# Altium PCB PCB1.PcbDoc
Units mm, origin at the board's own origin, x right, y up, seen from the top; angles counter-clockwise.
Board outline 10 x 16 mm, 2 copper layers (Top Layer, Bottom Layer); 13 components, 13 nets, 42 pads, 9 vias.
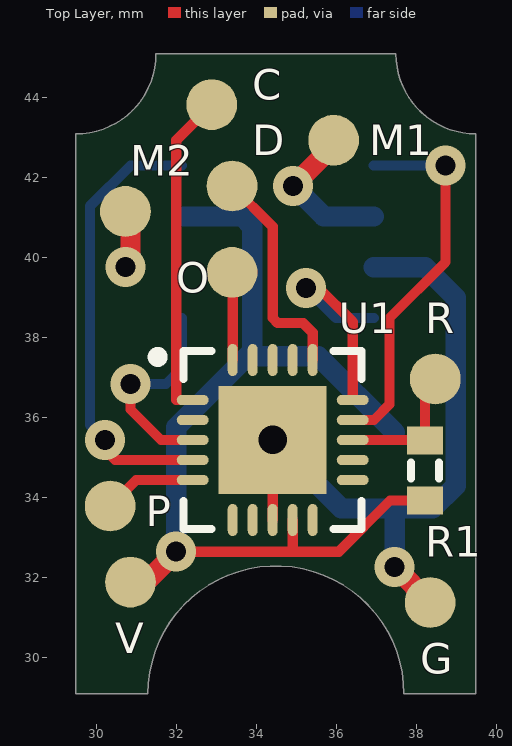
[diagram p0: Top Layer view]
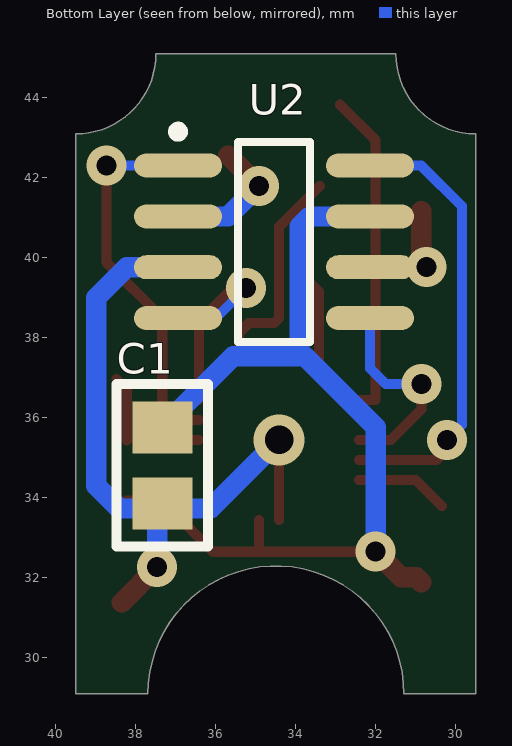
[diagram p1: Bottom Layer view, seen from below]

## Layer stack, top to bottom
Top Layer: signal copper 0.0356
Dielectric: dielectric 0.32, FR-4, Dk 4.8
Bottom Layer: signal copper 0.0356

## Board outline
29.497,29.084 29.497,43.084 ccw(c29.497,45.084) 31.497,45.084 37.497,45.084 ccw(c39.497,45.084) 39.497,43.084 39.497,29.084 37.697,29.084 ccw(c34.497,29.084) 31.297,29.084

## Design rules (kind name [scope] priority, off if disabled: settings)
AssemblyTestPointUsage [All] p1 off:
AssemblyTestpoint [All] p1 off: testpointundercomponent=TRUE minsize=1.016 maxsize=2.54 preferedsize=1.524 minholesize=0 maxholesize=1.016 preferedholesize=0.813 testpointgrid=0.025 usegrid=TRUE gridtolerance=0 allowsidetop=TRUE allowsidebottom=TRUE
Clearance Clearance_Polygon [InPolygon] p1: gap=0.203
Clearance [All] p2: gap=0.203
FabricationTestPointUsage [All] p1 off: valid=0 allowmultiple=FALSE
FabricationTestpoint [All] p1 off: side=3 testpointundercomponent=TRUE minsize=1.016 maxsize=2.54 preferedsize=1.524 minholesize=0 maxholesize=1.016 preferedholesize=0.813 testpointgrid=0.025 allowsidetop=TRUE allowsidebottom=TRUE usegrid=TRUE gridtolerance=0
HoleSize [All] p1: absolutevalues=TRUE maxlimit=6.3 minlimit=0.3 maxpercent=80.000 minpercent=20.000
HoleToHoleClearance [All] p1: gap=0.152 allowstackedmicrovias=TRUE
MinimumSolderMaskSliver [All] p1: minsoldermaskwidth=0.1
PlaneConnect [All] p1 off: planeconnectstyle=Direct reliefexpansion=0.508 reliefentries=4 reliefconductorwidth=0.254 reliefairgap=0.254
PlaneConnect Heatsink [(InNet('VCC') OR InNet('VFF'))] p2: planeconnectstyle=Direct reliefexpansion=0.508 reliefentries=4 reliefconductorwidth=0.254 reliefairgap=0.254
PolygonConnect Heatsink2 [(InNet('VCC') OR InNet('VFF')) OR IsVia] p1: connectstyle=Direct reliefconductorwidth=0.508 reliefentries=4 polygonreliefangle="90 Angle"
PolygonConnect [All] p2: connectstyle=Relief reliefconductorwidth=0.508 reliefentries=4 polygonreliefangle="90 Angle"
RoutingVias [All] p1: holewidth=0.5 width=1 viastyle="Through Hole" minholewidth=0.3 minwidth=0.762 maxholewidth=6.3 maxwidth=1.778
SilkToSilkClearance [All] p1 off: silktosilkclearance=0.152
SilkscreenOverComponentPads [All] p1: minsilkscreentomaskgap=0.152
SolderMaskExpansion Tenting [IsVia] p1: expansion=-1.016
SolderMaskExpansion [All] p2: expansion=0.127
Width [All] p1: maxlimit=1.27 minlimit=0.152 preferedwidth=0.254
18 further rules are at their usual default settings.

## Components (designator, comment, footprint, x,y, rotation, side; value= is the part's Value field where it differs from the comment)
C "Test Point" TestPoint 32.893,43.815 r90 top
C1 "CapSMD" 0805 37.338,34.798 r90 bottom
D "Test Point" TestPoint 33.401,41.783 r90 top
G "Test Point" TestPoint 38.354,31.369 r90 top
M1 "Test Point" TestPoint 35.941,42.926 r0 top
M2 "Test Point" TestPoint 30.734,41.148 r0 top
O "Test Point" TestPoint 33.401,39.624 r90 top
P "Test Point" TestPoint 30.353,33.782 r90 top
R "Test Point" TestPoint 38.481,36.957 r90 top
R1 "ResSMD" RESC1608L 38.227,34.671 r270 top
U1 "ATtiny44-15MZ" 20M1_N 34.417,35.433 r0 top
U2 "ZXMHC3F381N8" SOIC8_N 34.544,40.386 r180 bottom
V "Test Point" TestPoint 30.861,31.877 r90 top

## Footprints (in the part's own frame and the unit in brackets; to place one, negate y for a bottom-side part, rotate by r counter-clockwise, add the part's x,y. Pads: shape width x height; smd on the part's side, far side on the other; paste and mask are expansions set on the pad)
20M1_N [mm] "QFN, 20-Leads, Body 4x4mm, Pitch 0.5mm, IPC Medium Density"
  oval 0.8x0.25 smd: 1(-2,1) 2(-2,0.5) 3(-2,0) 4(-2,-0.5) 5(-2,-1) 11(2,-1) 12(2,-0.5) 13(2,0) 14(2,0.5) 15(2,1)
  oval 0.25x0.8 smd: 6(-1,-2) 7(-0.5,-2) 8(0,-2) 9(0.5,-2) 10(1,-2) 16(1,2) 17(0.5,2) 18(0,2) 19(-0.5,2) 20(-1,2)
  rect 2.7x2.7 smd: 21(0,0)
  silkscreen extent -3,-2.22 2.22,2.22, body extent -2.07,-2.07 2.07,2.07, height 0.8
0805 [mm] "Body 2.0 x 1.2 mm (LxW typ)"
  rect 1.3x1.5 smd: 1(-0.95,0) 2(0.95,0)
  silkscreen extent -2.03,-1.14 2.03,1.14, body extent -0.95,-0.6 1.05,0.65, height 0.78
RESC1608L [mm] "Chip Resistor, Body 1.6x0.8mm, IPC High Density"
  rect 0.7x0.9 smd: 1(-0.75,0) 2(0.75,0)
  silkscreen extent -0.2,-0.35 0.2,0.35, body extent -0.85,-0.48 0.85,0.48, height 0.6
SOIC8_N [mm] "8-Pin Small Outline Integrated Circuit Package (SOIC8), IPC Medium Density"
  oval 2.2x0.6 smd: 1(-2.4,1.905) 2(-2.4,0.635) 3(-2.4,-0.635) 4(-2.4,-1.905) 5(2.4,-1.905) 6(2.4,-0.635) 7(2.4,0.635) 8(2.4,1.905)
  silkscreen extent -2.53,-2.5 0.9,2.88, body extent -1.95,-2.45 1.95,2.45, height 1.75
TestPoint [mm]
  round 1.27 smd: 1(0,0)

## Part data
C1: "Capacitor"
R1: "Resistor"
U1: "8-bit Automotive AVR Microcontroller, 4KB Flash, 256 Bytes EEPROM, 256 Bytes SRAM, Automotive Grade (-40° to +125°C), 20-Pin VQFN"
U2: library part ZXMHC3F381N8TC, "Power Driver ICs MOSFET H-BRIDGE SOP-8L"

## Via types
v1: diameter 1, hole 0.5, Top Layer to Bottom Layer, 8 vias
v2: diameter 1.27, hole 0.711, Top Layer to Bottom Layer, 1 vias

## Nets (pads, with @x,y where several pads share a name; then routed paths per layer and width w, separated by ;. In a path a pad name is that pad's centre, name@x,y a point inside that pad or via, vN(x,y) a via of type N, cw(c..) or ccw(c..) an arc to the next point about the centre after c; other vN are vias at no path point)
CLOCK: C.1 U1.1 | length 8.2
  Top Layer w0.254: U1.1 32.004,36.433 32.004,42.926 C.1
DATA: D.1 U1.16 | length 5.6
  Top Layer w0.254: D.1 34.417,40.767 34.417,40.163 34.417,38.481 34.544,38.354 35.179,38.354 35.417,38.116 U1.16
DIR1: U1.3 U2.5 | length 5.2
  Top Layer w0.254: v1(30.861,36.83) 30.861,36.195 31.623,35.433 U1.3
  Bottom Layer w0.254: v1(30.861,36.83) 31.75,36.83 32.144,37.224 U2.5
DIR2: U1.4 U2.8 | length 11.3
  Top Layer w0.254: v1(30.226,35.433) 30.226,35.179 30.472,34.933 U1.4
  Bottom Layer w0.254: v1(30.226,35.433) 29.845,35.814 29.845,41.275 30.861,42.291 U2.8
GND: C1.1 G.1 U1.8 U1.21 U2.3 | length 17.4
  Top Layer w0.254: U1.8 v2(34.417,35.433)
  Top Layer w0.508: v1(37.465,32.258) G.1
  Bottom Layer w0.508: v2@34.353,35.496 36.129,33.721 C1.1@37.465,33.721 ; U2.3 38.227,39.751 38.989,38.989 38.989,34.29 38.42,33.721 C1.1@37.465,33.721 ; v1(37.465,32.258) C1.1@37.465,33.721
MISO: O.1 U1.20 | length 2.4
  Top Layer w0.254: U1.20 33.417,39.132 O.1@33.909,39.624
NetM1_1: M1.1 U2.2 | length 3.4
  Top Layer w0.508: v1(34.925,41.783) M1.1@35.687,42.545
  Bottom Layer w0.508: v1(34.925,41.783) 35.687,41.021 U2.2
NetM2_1: M2.1 U2.6 | length 1.4
  Top Layer w0.508: v1@30.861,39.751 M2.1@30.861,41.148
  other v1: 30.734,39.751
POT: P.1 U1.5 | length 2.3
  Top Layer w0.254: P.1 31.004,34.433 U1.5
PWM1: U1.14 U2.1 | length 9.4
  Top Layer w0.254: U1.14 36.949,35.933 37.338,36.322 37.338,38.481 38.735,39.878 v1(38.735,42.291)
  Bottom Layer w0.254: U2.1 v1(38.735,42.291)
PWM2: U1.15 U2.4 | length 5.5
  Top Layer w0.254: v1(35.247,39.229) 35.574,39.229 36.417,38.386 U1.15
  Bottom Layer w0.254: v1(35.247,39.229) 35.995,38.481 U2.4
RESET: R1.1 R.1 U1.13 | length 3.2
  Top Layer w0.254: U1.13 R1.1@37.961,35.433 ; R1.1 38.227,36.703 R.1
VCC: C1.2 R1.2 U1.9 U2.7 V.1 | length 24.1
  Top Layer w0.254: v1(32.004,32.639) 34.917,32.639 ; U1.9 34.917,32.639 ; R1.2 37.35,33.921 36.068,32.639 34.917,32.639
  Top Layer w0.508: V.1 30.988,32.004 31.369,32.004 v1(32.004,32.639)
  Bottom Layer w0.508: v1(32.004,32.639) 32.004,35.748 33.782,37.526 35.56,37.526 C1.2@37.465,35.621 ; U2.7 33.655,41.021 33.909,40.767 33.909,39.177 33.909,37.653
pads on no net: U1.2 U1.6 U1.7 U1.10 U1.11 U1.12 U1.17 U1.18 U1.19

## Silkscreen, mask and mechanical layers (free items; w line width, h text height)
Mechanical 1:
  the board outline again, w0.127